# Altium PCB CPLD_Programmer-CS.PcbDoc
Units mil, origin at the board's own origin, x right, y up, seen from the top; angles counter-clockwise.
Board outline 1181.1 x 787.4 mil, 2 copper layers (Top Layer, Bottom Layer), stack 50.044 mil thick; 29 components, 51 nets, 142 pads, 54 vias.
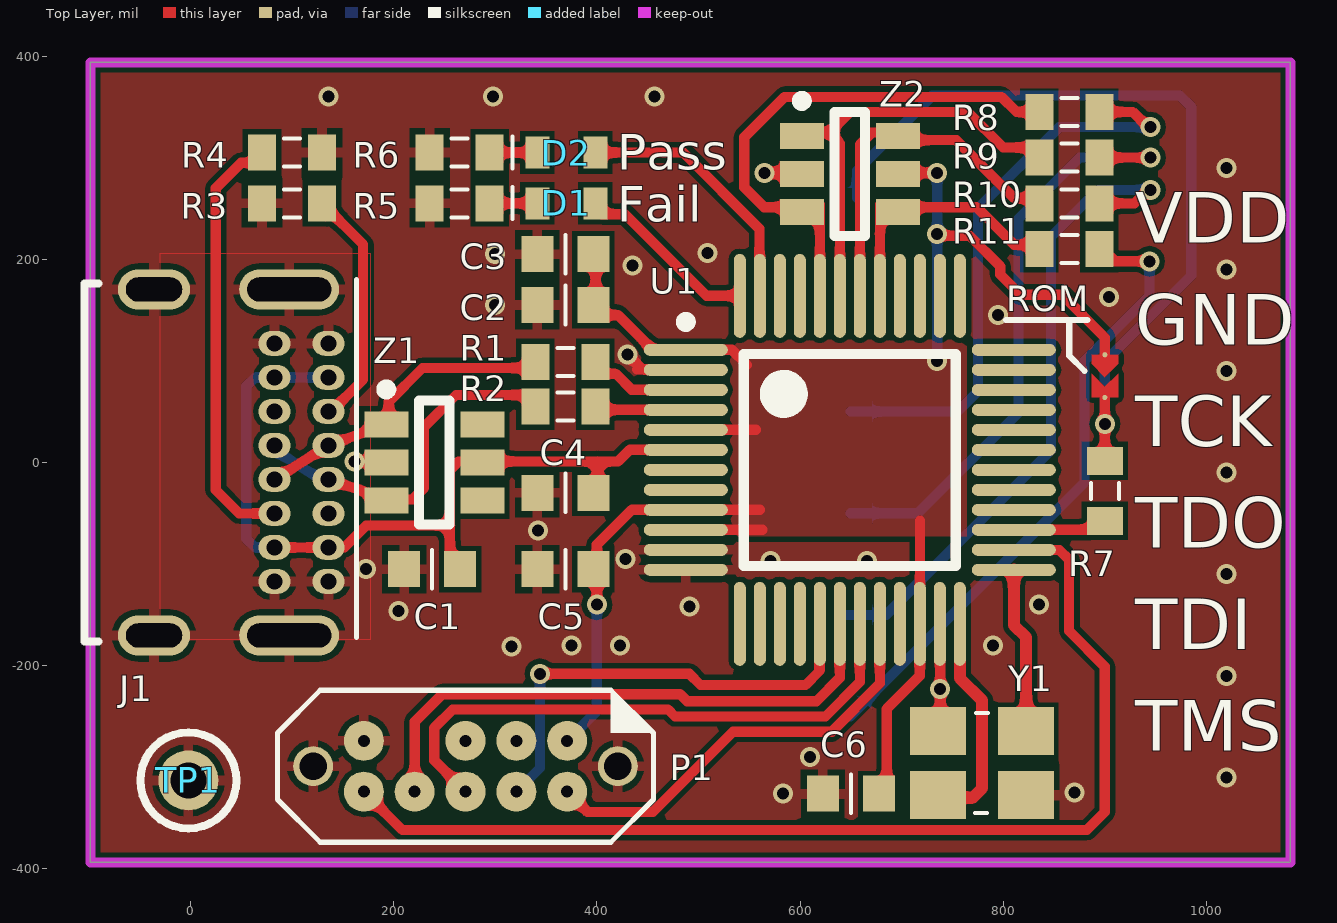
[diagram p0: Top Layer view]
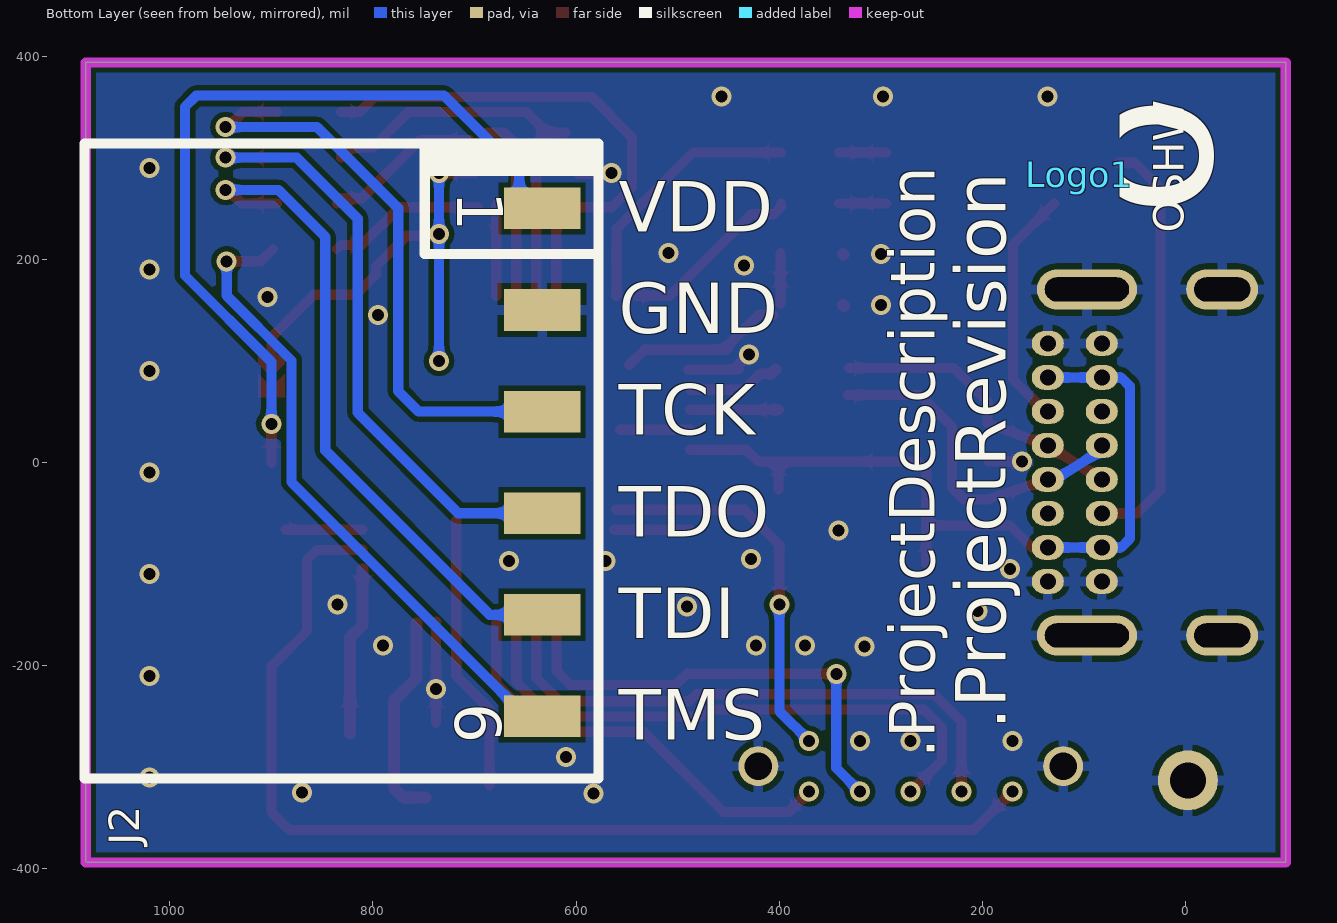
[diagram p1: Bottom Layer view, seen from below]

## Layer stack, top to bottom
Top Solder: solder mask 0.4, Solder Resist, Dk 3.5
Top Layer: signal copper 1.4
Dielectric 1: dielectric 47.2441, FR-4, Dk 4.8
Bottom Layer: signal copper 1.4
Bottom Solder: solder mask 0.4, Solder Resist, Dk 3.5

## Board outline
-98.43,-393.7 1082.68,-393.7 1082.68,393.7 -98.43,393.7

## Design rules (kind name [scope] priority, off if disabled: settings)
AssemblyTestPointUsage SilkToBoardRegionClearance_1 [All] p2:
AssemblyTestPointUsage SilkToBoardRegionClearance [All] p3:
Clearance [All] p1: gap=5 ignorepadtopadclearanceinfootprint=FALSE
HoleSize [All] p1: absolutevalues=TRUE maxlimit=250 minlimit=9.84 maxpercent=80.000 minpercent=20.000
MatchedLengths DiffPair_DIFF100MatchedLengths [InDifferentialPairClass('DIFF100')] p1: tolerance=6 checknetsindiffpair=TRUE checkdiffpairvsdiffpair=FALSE checkxsignals=FALSE checkothers=FALSE
MinimumAnnularRing [All] p1: minimumring=3.5
MinimumSolderMaskSliver [All] p1 off: minsoldermaskwidth=3.94
MinimumSolderMaskSliver SilkscreenOverComponentPads_2 [All] p2 off: minsoldermaskwidth=10
MinimumSolderMaskSliver SilkToSolderMaskClearance_1 [IsPad] p3 off: minsoldermaskwidth=10
MinimumSolderMaskSliver SilkscreenOverComponentPads_1 [All] p4 off: minsoldermaskwidth=10
MinimumSolderMaskSliver SilkToSolderMaskClearance [IsPad] p5 off: minsoldermaskwidth=10
MinimumSolderMaskSliver SilkscreenOverComponentPads [All] p6 off: minsoldermaskwidth=10
NetAntennae [All] p1 off: netantennaetolerance=0
PlaneClearance [All] p1: clearance=10
PlaneConnect [All] p1: planeconnectstyle=Relief reliefexpansion=20 reliefentries=4 reliefconductorwidth=10 reliefairgap=6
PolygonConnect PolygonConnect_Via [IsVia] p1: connectstyle=Direct reliefconductorwidth=10 reliefentries=4 polygonreliefangle="90 Angle" airgapwidth=10
PolygonConnect [All] p2: connectstyle=Relief reliefconductorwidth=10 reliefentries=4 polygonreliefangle="90 Angle" airgapwidth=6
RoomDefinition CPLD_Programmer [InComponentClass('CPLD_Programmer')] p1: confinementstyle=ConfineIn formatcopy=TRUE lockcomponents=FALSE outline -445.92,-494.33 1954.08,-494.33 1954.08,505.67 -445.92,505.67
RoutingVias [All] p1: holewidth=12 width=25 viastyle="Through Hole" minholewidth=12 minwidth=25 maxholewidth=28 maxwidth=50
SilkToBoardRegionClearance SilkToBoardRegionClearance_2 [All] p1 off:
SilkToSilkClearance [All] p1 off: silktosilkclearance=10
SilkToSolderMaskClearance SilkToSolderMaskClearance_2 [IsPad] p1 off: minsilkscreentomaskgap=10 clearancetoexposedcopper=TRUE
SolderMaskExpansion [All] p1: expansion=4 istentingtop=FALSE
Width [All] p1: maxlimit=100 minlimit=6 preferedwidth=10
22 further rules are at their usual default settings.

## Components (designator, comment, footprint, x,y, rotation, side; value= is the part's Value field where it differs from the comment)
C1 "100nF" CCNP1608-0603_N 238,-105 r0 top
C2 "2.2uF" CCNP1608-0603_N 369,155 r0 top
C3 "100nF" CCNP1608-0603_N 369,205 r0 top
C4 "100nF" CCNP1608-0603_N 369,-30 r0 top
C5 "100nF" CCNP1608-0603_N 369,-105 r0 top
C6 "100nF" CCNP1608-0603_N 650,-326 r0 top
D1 "LED Red" LED1608-0603-RED_N 370,255 r0 top
D2 "LED Green" LED1608-0603-GREEN_N 370,305 r0 top
J1 "USB4085-GF-A" USB4085-GF-A 50,0 r0 top locked
J2 "Header, 6-Pin" SAMTEC-SMH-106-02-X-S 920,0 r270 bottom locked
Logo1 "OSHW Logo" OSHW 105,283 r90 bottom
P1 "SWD Connector 2x5-Pin" SWD-2x5-Jig-Pads 370.76,-274 r180 top
R1 "330R" CR1608-0603_N 369,99 r0 top
R2 "330R" CR1608-0603_N 369,55 r0 top
R3 "5.1K" CR1608-0603_N 100,255 r0 top
R4 "5.1K" CR1608-0603_N 100,305 r0 top
R5 "1K" CR1608-0603_N 265,255 r0 top
R6 "1K" CR1608-0603_N 265,305 r0 top
R7 "10K" CR1608-0603_N 900,-28 r90 top
R8 "100R" CR1608-0603_N 865,345 r0 top
R9 "100R" CR1608-0603_N 865,300 r0 top
R10 "100R" CR1608-0603_N 865,255 r0 top
R11 "100R" CR1608-0603_N 865,210 r0 top
ROM "LinkOpen" SolderBridge(Open) 900,85 r270 top
TP1 "TP" TP -2,-313 r0 top
U1 "MK20DX128VLF5" TSQFP50P900X900-48M 649,2.5 r270 top locked
Y1 "16 MHz" Crystal_SMD_3.2x2.5 779,-296 r0 top
Z1 "CM1293A-04SO" SOT457_N 240,0 r0 top
Z2 "CM1293A-04SO" SOT457_N 649,284 r0 top

## Footprints (in the part's own frame and the unit in brackets; to place one, negate y for a bottom-side part, rotate by r counter-clockwise, add the part's x,y. Pads: shape width x height; smd on the part's side, far side on the other; paste and mask are expansions set on the pad)
CCNP1608-0603_N [mm]
  rect 0.8x0.9 smd: 1(-0.7,0) 2(0.7,0)
  silkscreen extent 0,-0.48 0,0.48, body extent -0.8,-0.4 0.8,0.4, height 0.3
CR1608-0603_N [mm]
  rect 0.7x0.9 smd: 1(-0.75,0) 2(0.75,0)
  silkscreen extent -0.2,-0.35 0.2,0.35, body extent -0.85,-0.4 0.85,0.4, height 0.56
Crystal_SMD_3.2x2.5 [mm] "Crystal SMT low profile 3.2 x 2.5 SMD"
  rect 1.4x1.2 smd: 1(-1.1,-0.8) 2(1.1,-0.8) 3(1.1,0.8) 4(-1.1,0.8)
  silkscreen extent -0.17,-1.25 0.15,1.25, body extent -1.55,-1.24 1.65,1.26, height 0.7
LED1608-0603-GREEN_N [mm] "SMT-LED 0603"
  rect 0.6x0.8 smd: A(0.725,0) K(-0.725,0)
  silkscreen extent -1.35,-0.39 -1.35,0.41, body extent -0.8,-0.4 0.8,0.4, height 0.7
LED1608-0603-RED_N [mm] "SMT-LED 0603"
  rect 0.6x0.8 smd: A(0.725,0) K(-0.725,0)
  silkscreen extent -1.35,-0.39 -1.35,0.41, body extent -0.8,-0.4 0.8,0.4, height 0.7
OSHW [mil] "OSHW Logo"
SAMTEC-SMH-106-02-X-S [mil]
  rect 40.95x75.2 smd: 1(-250,286.5) 2(-150,286.5) 3(-50,286.5) 4(50,286.5) 5(150,286.5) 6(250,286.5)
  silkscreen extent -314,-164 311,342, body extent -310,-162 310,308, height 95
SolderBridge(Open) [mil]
  round 5 smd paste-5 mask+0: 1(-21,0) 2(21,0)
  Top Layer region: -2.5,13 10.5,0 -2.5,-13 21,-13 21,13
  Top Layer region: -21,13 -12,13 1,0 -12,-13 -21,-13
SOT457_N [mm] "SOT23, 6-Leads, Body 2.9x1.5mm, Pitch 0.95mm, Lead Span 2.8mm, IPC Medium Density"
  rect 1.1x0.65 smd: 1(-1.2,0.95) 2(-1.2,0) 3(-1.2,-0.95) 4(1.2,-0.95) 5(1.2,0) 6(1.2,0.95)
  silkscreen extent -1.32,-1.55 0.38,1.95, body extent -1.34,-1.5 1.5,1.4, height 1.21
SWD-2x5-Jig-Pads [mm] "Connector; SWD; 2x5 Position"
  round 1 hole 0.69: 0(-1.27,0.635) 0(6.35,0.635)
  round 1 smd: 1(0,0) 2(0,1.27) 3(1.27,0) 4(1.27,1.27) 5(2.54,0) 6(2.54,1.27) 8(3.81,1.27) 9(5.08,0) 10(5.08,1.27)
  silkscreen extent -2.16,-1.26 7.24,2.53
TP [mm] "Testpoint (small)"
  round 1.5 hole 0.9: 1(0,0)
  silkscreen extent -1.2,-1.2 1.2,1.2
TSQFP50P900X900-48M [mm] "Thin QFP, 48-Leads, Body 7x7mm, Pitch 0.5mm, IPC Low Density"
  oval 0.3x2.1 smd: 1(-2.75,-4.1) 2(-2.25,-4.1) 3(-1.75,-4.1) 4(-1.25,-4.1) 5(-0.75,-4.1) 6(-0.25,-4.1) 7(0.25,-4.1) 8(0.75,-4.1) 9(1.25,-4.1) 10(1.75,-4.1) 11(2.25,-4.1) 12(2.75,-4.1) 25(2.75,4.1) 26(2.25,4.1) 27(1.75,4.1) 28(1.25,4.1) 29(0.75,4.1) 30(0.25,4.1) 31(-0.25,4.1) 32(-0.75,4.1) 33(-1.25,4.1) 34(-1.75,4.1) 35(-2.25,4.1) 36(-2.75,4.1)
  oval 2.1x0.3 smd: 13(4.1,-2.75) 14(4.1,-2.25) 15(4.1,-1.75) 16(4.1,-1.25) 17(4.1,-0.75) 18(4.1,-0.25) 19(4.1,0.25) 20(4.1,0.75) 21(4.1,1.25) 22(4.1,1.75) 23(4.1,2.25) 24(4.1,2.75) 37(-4.1,2.75) 38(-4.1,2.25) 39(-4.1,1.75) 40(-4.1,1.25) 41(-4.1,0.75) 42(-4.1,0.25) 43(-4.1,-0.25) 44(-4.1,-0.75) 45(-4.1,-1.25) 46(-4.1,-1.75) 47(-4.1,-2.25) 48(-4.1,-2.75)
  silkscreen extent -3.57,-4.22 2.65,2.65, body extent -4.5,-4.55 4.5,4.45, height 1.6
USB4085-GF-A [mm] "USB-C Connector"
  oval 0.8x0.62 hole 0.4: A1(2.18,2.975) A4(2.18,2.125) A5(2.18,1.275) A6(2.18,0.425) A7(2.18,-0.425) A8(2.18,-1.275) A9(2.18,-2.125) A12(2.18,-2.975) B1(0.83,-2.975) B4(0.83,-2.125) B5(0.83,-1.275) B6(0.83,-0.425) B7(0.83,0.425) B8(0.83,1.275) B9(0.83,2.125) B12(0.83,2.975)
  oval 1.8x1 hole 0.6 slot 1.4 at 0 deg: SH(-2.18,-4.325) SH(-2.18,4.325)
  oval 2.5x1 hole 0.6 slot 2.1 at 0 deg: SH(1.2,-4.325) SH(1.2,4.325)
  silkscreen extent -3.92,-4.47 2.88,4.57, body extent -6.41,-4.52 2.76,4.51, height 3.46

## Part data
C1 C2 C3 C4 C5 C6: library part Cap_CCNP_0603, "Capacitor non-polar SMT 0603"
D1: library part LED-0603-Red, "LED 0603 Red"
D2: library part LED-0603-Green, "LED 0603 Green"
J1: "USB-C, USB 2.0 Receptacle Connector 16 Position Through Hole, Right Angle"
J2: library part "Header Female 1x6H-SMT"
P1: library part SWD2X5_JIG
R1 R2 R3 R4 R5 R6 R7 R8 R9 R10 R11: library part Res_CR0603, "Resistor SMT 0603"
TP1: "Test Point"
U1: "Arm Cortex M4"
Y1: library part "Crystal 16MHz", "Crystal SMD 3.2 x 2.5 x 0.7 mm"
Z1 Z2: "Ultra low capacitance quadruple rail-to-rail ESD protection"

## Via types
v1: diameter 19.68, hole 11.81, Top Layer to Bottom Layer, tented both sides, 45 vias
v2: diameter 19.68, hole 11.81, Top Layer to Bottom Layer, tented bottom, 9 vias

## Nets (pads, with @x,y where several pads share a name; then routed paths per layer and width w, separated by ;. In a path a pad name is that pad's centre, name@x,y a point inside that pad or via, vN(x,y) a via of type N, cw(c..) or ccw(c..) an arc to the next point about the centre after c; other vN are vias at no path point)
3V3: C2.2 C3.2 C5.2 C6.2 P1.1 ROM.1 U1.1 U1.5 U1.9 U1.10 U1.22 Z2.5 | length 1464.7
  Top Layer w10: C2.2@398.91,156 C3.2@398.91,206 ; v1(400,-140) 400,-81 434.46,-46.54 U1.9@489.63,-46.54 ; C2.2@406,145 421,145 U1.1@455.06,110.94 ; U1.1@452.23,110.94 U1.1@455.06,110.94 ; U1.10@487.43,-66 487.66,-66.23 562.77,-66.23 ; U1.9@487.66,-46.54 560.54,-46.54 ; U1.5@487.66,32.2 556.8,32.2 ; 547.76,96 532.82,110.94 U1.1@455.06,110.94 ; C6.2@685.43,-318 685.43,-242.57 717.97,-210.03 717.97,-57.03 ; Z2.5@700.09,285 v1(735,285) ; v1(735,225) 736.85,223.15 766.85,223.15 797,193 797,185 817,165 858,165 900,123 ROM.1
  Bottom Layer w10: v2(370.76,-274) 400,-244.76 v1(400,-140) ; v1(735,100) v1(735,225) v1(735,285)
5V: C1.2 C4.2 J1.A4 J1.A9 J1.B4 J1.B9 U1.6 Z1.5 | length 846.4
  Top Layer w10: J1.B4 J1.A9 151.38,-83.66 172.94,-62 255.43,-62 ; C1.2@255.43,-100 255.43,-62 ; C4.2@400.81,-26.54 400.81,1 ; U1.6@487.66,12.51 432.51,12.51 421,1 400.81,1 ; 255.43,-62 255.43,-7.57 264,1 400.81,1
  Bottom Layer w10: J1.A9@128.46,-83.66 J1.B4 63.66,-83.66 55,-75 55,75 63.66,83.66 J1.B9 J1.A4@128.46,83.66
ADC0_DM0: U1.8
ADC0_DP0: U1.7
EXTAL: U1.25 Y1.3 | length 166.3
  Top Layer w11.81: U1.25@810.49,-105.6 810.49,-160.08 822.65,-172.23 Y1.3@822.65,-266.91
EXTAL32: U1.15
GND: C1.1 C2.1 C3.1 C4.1 C5.1 C6.1 J1.A1 J1.A12 J1.B1 J1.B12 J1.SH J2.2 P1.0 P1.3 P1.5 P1.9 R3.1 R4.2 R5.1 R6.1 TP1.1 U1.2 U1.11 U1.12 U1.23 Y1.2 Y1.4 Z1.2 Z2.2 | length 238
  Top Layer w10: v1(161.43,1) Z1.2@193.94,1 ; v1(428,-95) v1@428,-94.6 ; v1(430,106) 430.35,106 444.75,91.6 ; 439.75,91.6 487.31,91.6 487.66,91.25 U1.2@489.63,91.25 ; U1.23@737.66,-156.78 738,-157.12 v1(738,-223) Y1.4@738,-256.19
  Top Layer w11.81: C2.1@336.35,154 C2.1@337.35,155 ; C3.1@336.79,204.44 C3.1@337.35,205 ; v1(565,285) Z2.2@597.6,285
  other v1: 583,-326 870,-325 1020,-310 610,-290 1020,-210 316,-181 375,-180 423,-180 790,-180 205,-146 491,-142 835,-140 1020,-110 173,-105 571,-97 666,-97 342,-67 1020,-10 1020,90 795,145 300,155 904,163 1020,190 435,194 300,205 509,206 1020,290 136,360 297.81,360 457,360
  other v2: 170.76,-274 270.76,-274 320.76,-274
Grn_LED: D2.A U1.47 | length 258.7
  Top Layer w10: D2.A 485,305 560,230 560,164.58 U1.47@560.49,164.09
NetD1_K: D1.K R5.2 | length 46.9
  Top Layer w10: R5.2 D1.K
NetD2_K: D2.K R6.2 | length 46.9
  Top Layer w10: R6.2 D2.K
NetJ1_A5: J1.A5 R3.2 | length 234.6
  Top Layer w10: R3.2 170,214.53 170,81.63 J1.A5@138.57,50.2
NetJ1_B5: J1.B5 R4.1 | length 406.6
  Top Layer w10: R4.1@65.97,295 50,295 25,270 25,-27.21 47.99,-50.2 J1.B5@73.51,-50.2
PTA4: U1.21
PTB1: U1.28
PTB2: U1.29
PTB3: U1.30
PTB16: U1.31
PTB17: U1.32
PTC0: U1.33
PTC1: U1.34
PTC2: U1.35
PTC3: U1.36
PTC4: U1.37
PTC5: U1.38
PTC6: U1.39
PTC7: U1.40
PTD4: U1.45
Red_LED: D1.A U1.48 | length 182.2
  Top Layer w10: D1.A 398.54,251.06 405.35,244.25 427.78,244.25 507.94,164.09 U1.48@540.81,164.09
RESETB: P1.10 U1.26 | length 1073.5
  Top Layer w10: v2(170.76,-324) 208.57,-361.81 882.28,-361.81 900,-344.09 900,-201 864.88,-165.88 864.88,-95.88 855.26,-86.26 810.84,-86.26 U1.26@810.49,-85.91
SWD_CLK: P1.4 U1.17 | length 457.8
  Top Layer w10: v1(344,-208) 491,-208 502,-219 605.55,-219 619.2,-205.35 619.2,-159.09 U1.17@619.55,-158.75
  Bottom Layer w10: v2(320.76,-324) 344,-300.76 v1(344,-208)
SWD_DIO: P1.2 U1.20 | length 427.3
  Top Layer w10: v2(370.76,-324) 390.76,-344 455,-344 534,-265 631.21,-265 678.6,-217.61 U1.20@678.6,-158.75
SWD_RX: P1.8 U1.18 | length 564.1
  Top Layer w10: v2(220.76,-324) 220.76,-255.25 247.85,-228.16 482,-228.16 488.84,-235 616.23,-235 639.23,-212 U1.18@639.23,-158.75
SWD_TX: P1.6 U1.19 | length 576.2
  Top Layer w10: v2(270.76,-324) 239.95,-293.2 239.95,-261.24 258.04,-243.16 470.16,-243.16 477,-250 625,-250 658.92,-216.08 U1.19@658.92,-158.75
TCK: J2.3 R8.2 | length 573.1
  Top Layer w10: R8.2 927.38,345 942.06,330.31 944.69,330.31 v1(945,330)
  Bottom Layer w10: J2.3@650,50 755,50 775.16,70.16 775.16,250.16 855,330 v1(945,330)
TCK_R: R8.1 U1.44 Z2.3 | length 513.2
  Top Layer w10: Z2.3@602,251.2 564.8,251.2 545.16,270.84 545.16,320.16 584.82,359.82 798.18,359.82 813,345 R8.1@831.54,345 ; U1.44@619.55,164.09 Z2.3@619.55,254
TDI: J2.5 R10.2 | length 652.2
  Top Layer w10: R10.2 929.13,255 942.38,268.25 v1(945,268.25)
  Bottom Layer w10: J2.5@645,-150 685,-150 847,12 847,222 893.25,268.25 v1(945,268.25)
TDI_R: R10.1 U1.42 Z2.6 | length 338.2
  Top Layer w10: U1.42@658.92,164.09 658.92,313 670.52,324.61 Z2.6@687.45,324.61 ; Z2.6@705.28,317.2 753.8,317.2 811,260 830.47,260 R10.1
TDO: J2.4 R9.2 | length 598.4
  Top Layer w10: R9.2@898.46,300 v1(945,300)
  Bottom Layer w10: J2.4@650,-50 716,-50 815,49 815,240 875,300 v1(945,300)
TDO_R: R9.1 U1.43 Z2.1 | length 418.7
  Top Layer w10: Z2.1@610.55,324.61 628.63,324.61 ; U1.43@639.23,164.09 639.23,314 628.63,324.61 ; R9.1@831.54,300 831.54,310 800,310 765.18,344.82 648.84,344.82 628.63,324.61
TMS: J2.6 R11.2 | length 620.5
  Top Layer w10: R11.2@898.46,210 910.46,198 v1(944,198)
  Bottom Layer w10: J2.6@649.58,-250 880.16,-19.42 880.16,100.37 944,164.21 v1(944,198)
TMS_R: R11.1 U1.41 Z2.4 | length 246
  Top Layer w10: U1.41@678.6,164.09 Z2.4@678.6,254 ; Z2.4@696.49,251.2 773.8,251.2 810.89,214.11 831.36,214.11 R11.1
USB_DM: R2.2 U1.4 | length 87.4
  Top Layer w10: R2.2@400.42,51.88 U1.4@487.66,51.88
  Top Layer w11.81: R2.2@404.28,51.74 R2.2@404.42,51.88
USB_DP: R1.2 U1.3 | length 91.8
  Top Layer w10: R1.2@408.21,87.19 418.81,87.19 434.43,71.57 U1.3@487.66,71.57
  Top Layer w11.81: R1.2@404.02,91.38 R1.2@408.21,87.19
USBD_R_N: J1.A7 J1.B7 R2.1 Z1.3 | length 341.4
  Top Layer w10: J1.A7 193.3,-35.77 195.19,-36.4 218.6,-36.4 230,-25 230,35 261.43,66.43 R2.1@333,66.43
  Bottom Layer w10: J1.B7@75.32,16.73 80.59,13.41 J1.A7@128.46,-16.73 ; J1.A7@126.2,-17.45 J1.A7@126.65,-17.73
USBD_R_P: J1.A6 J1.B6 R1.1 Z1.1 | length 294.6
  Top Layer w10: J1.B6 J1.A6 Z1.1@192.72,37.5 ; Z1.1@195.19,38.4 195.19,59.83 228.36,93 R1.1@331.28,93
VBAT: U1.16
Vref: J2.1 R7.2 ROM.2 | length 802.7
  Top Layer w10: R7.2@900,-0.47 v1(900,38) ROM.2
  Bottom Layer w10: J2.1@656.06,260.2 656.06,287.06 730,361 974,361 985,350 985,184 900,99 v1(900,38)
Vref_R: R7.1 U1.27 | length 75.7
  Top Layer w10: U1.27@810.49,-66.23 R7.1@886.24,-66.23
VREFO: U1.13
XTAL: U1.24 Y1.1 | length 206.1
  Top Layer w11.81: Y1.1@748.1,-329.9 770.1,-329.9 779.34,-320.66 779.34,-234.34 757.34,-212.34 U1.24@757.34,-158.75
XTAL32: U1.14
pads on no net: J1.A8 J1.B8 U1.46 Z1.4 Z1.6

## Polygon pours and split planes (outlines as drawn)
no net on Top Layer "Top Layer-No Net" (solid, remove dead copper, pour order 10): -29.92,205.67 177.19,205.67 177.19,-174.33 -29.92,-174.33
GND on Top Layer "Top Layer-No Net" (solid, remove dead copper, pour order 8): -98.42,-393.7 -98.43,393.7 1082.68,393.7 1082.68,-393.7
3V3 on Top Layer "Top Layer-No Net" (solid, pour order 6): 531.12,161.37 764.08,161.37 764.08,-72.49 531.12,-72.49
GND on Bottom Layer "Top Layer-No Net" (solid, remove dead copper, pour order 7): -90,393.7 1082.68,393.7 1082.68,-393.7 -90,-393.7

## Keep-outs
Keep-Out Layer:
  the board outline again, w10

## Silkscreen, mask and mechanical layers (free items; w line width, h text height)
Top Overlay:
  lines w6: 803,140 883,140 ; 865,140 865,105 880,90
  text "Pass" at 420,288 h35
  text "Fail" at 420,237 h35
  text "VDD" at 930,216 h50
  text "GND" at 930,116 h50
  text "TCK" at 930,16 h50
  text "TDO" at 930,-84 h50
  text "TDI" at 930,-184 h50
  text "TMS" at 930,-284 h50
Bottom Overlay:
  text "VDD" at 558,227 h50
  text "GND" at 558,127 h50
  text "TCK" at 558,27 h50
  text "TDO" at 558,-73 h50
  text "TDI" at 558,-173 h50
  text ".ProjectRevision" at 177,-263 h50 r270
  text "TMS" at 558,-273 h50
  text ".ProjectDescription" at 247,-291 h45 r270

## Dimensions
-98.43,393.7 to 1082.68,393.7 on Mechanical 1
-98.43,-393.7 to -98.43,393.7 on Mechanical 1

## Text inside footprints (layer, text, board x,y; h text height)
J2: Bottom Overlay "6" at 734,-237 h77.5 r90; Bottom Overlay "1" at 732,267 h77.5 r90; Mechanical 40 "12.700" at 540,31.5 h15.5 r90; Mechanical 40 "15.748" at 1199.02,31.5 h15.5 r90; Mechanical 40 "2.540" at 512.52,400.98 h15.5 r90; Mechanical 40 "8.509" at 925,422.99 h15.5 r90; Mechanical 16 "6" at 658.5,-341.14 h77.5 r90; Mechanical 16 "1" at 658.5,381.65 h77.5 r90
Logo1: Bottom Overlay "OSHW" at 2,226 h30 r270; Bottom Overlay "o" at -101,362 h400 r270